# Altium PCB Toygether_PCB.PcbDoc (part 2 of 2)
Units mm, origin at the board's own origin, x right, y up, seen from the top; angles counter-clockwise.
Board outline 55 x 58.13 mm, 5 copper layers (Top Layer, Signal Layer 1, Signal Layer 2, Signal Layer 3, Bottom Layer), stack 0.941 mm thick; 93 components, 74 nets, 341 pads, 162 vias.
Unrouted connection lines stored in the file: 2.
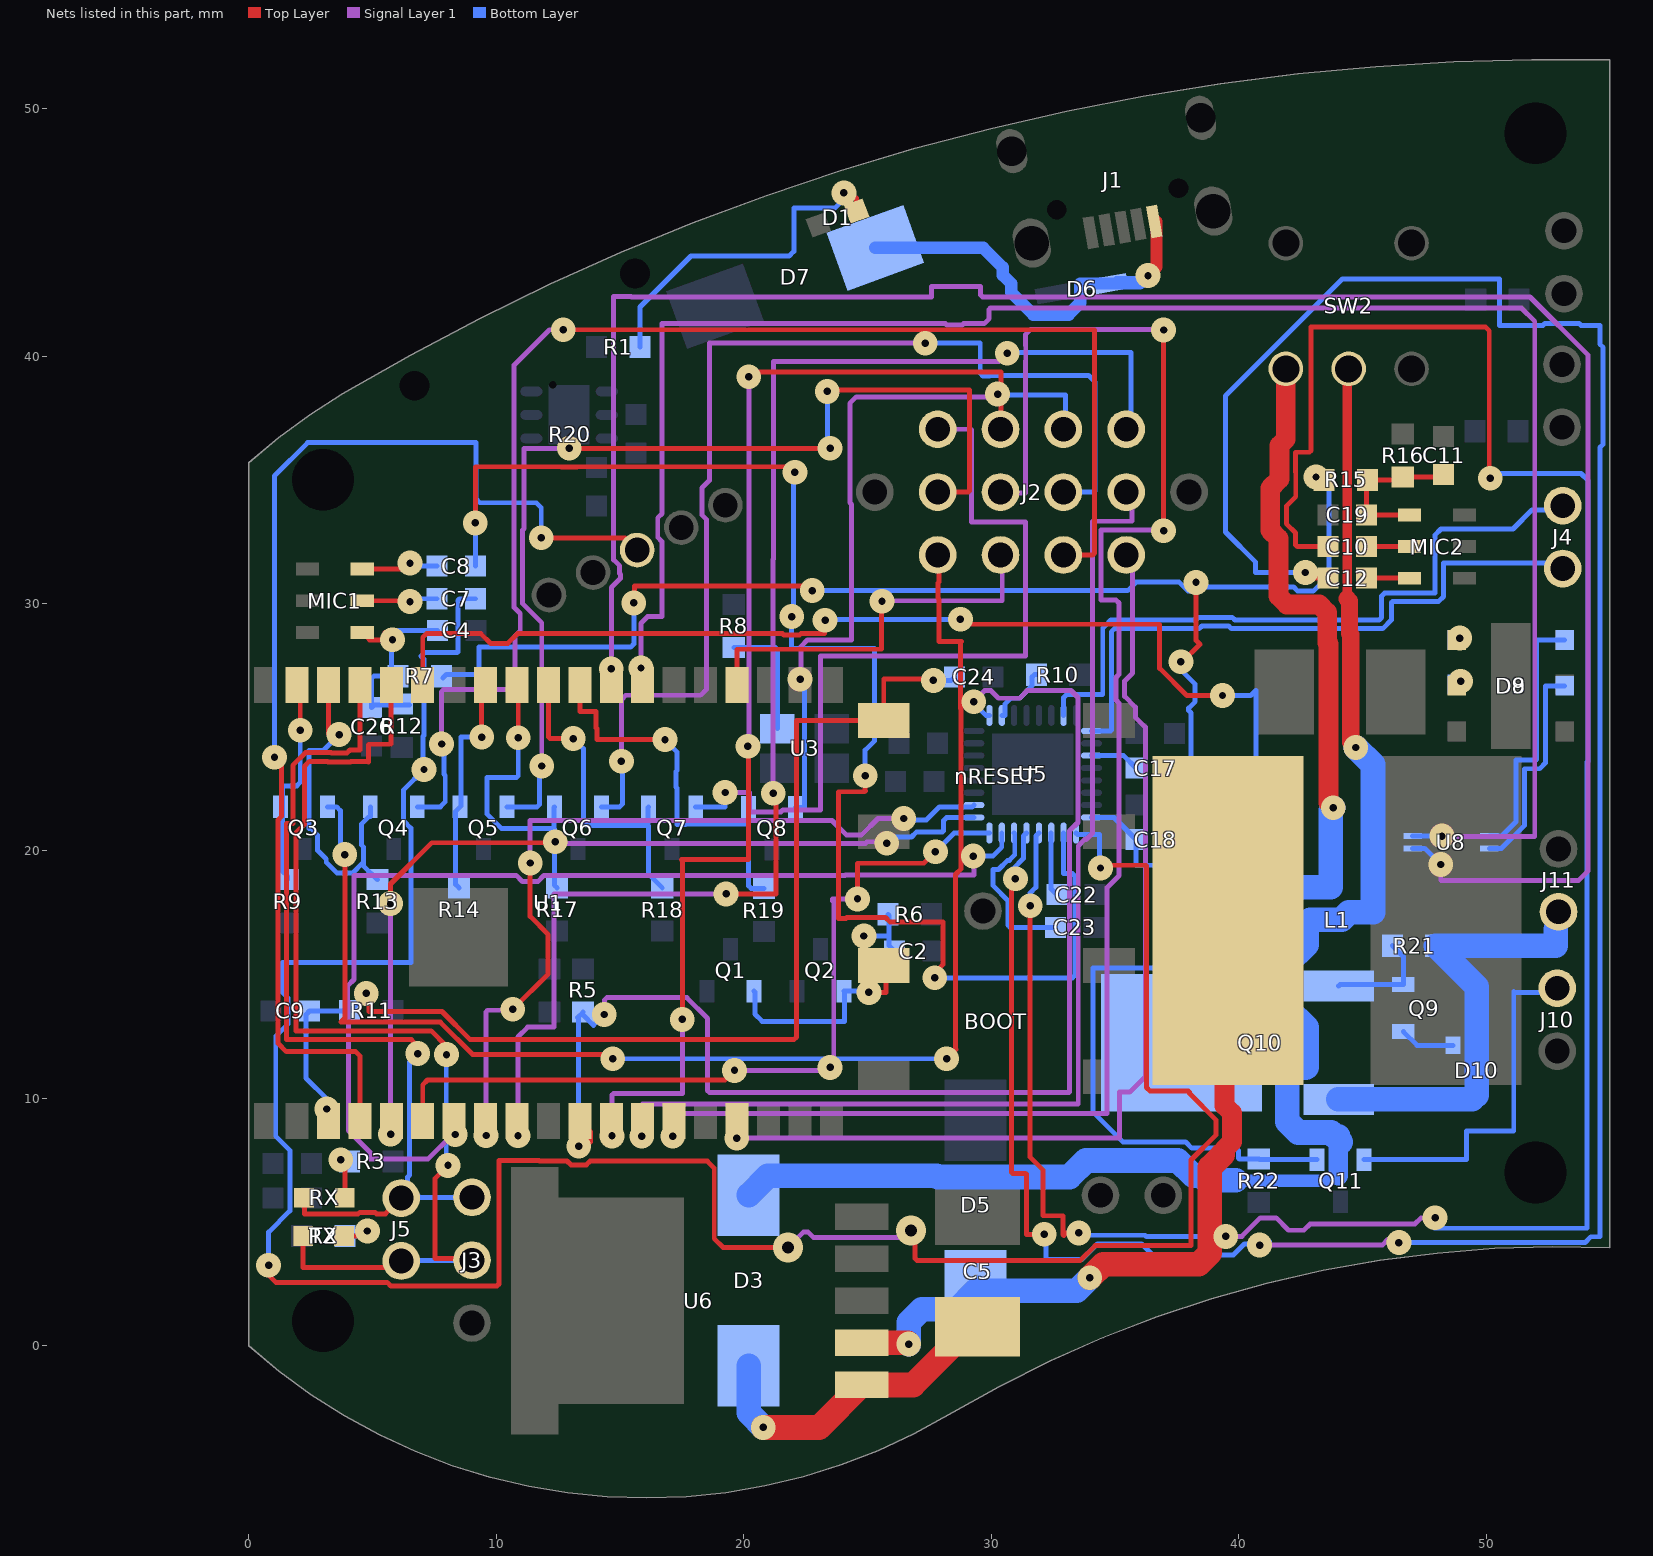
[diagram p5: the nets of this part, all layers, seen from the top]

## Via types
v1: diameter 1, hole 0.3, Top Layer to Bottom Layer, 78 vias
v2: diameter 1, hole 0.3, Top Layer to Signal Layer 1, 31 vias
v3: diameter 1, hole 0.3, Signal Layer 1 to Bottom Layer, 27 vias
v4: diameter 1.27, hole 0.711, Top Layer to Bottom Layer, 8 vias
v5: diameter 1.2, hole 0.5, Signal Layer 1 to Bottom Layer, 7 vias
v6: diameter 1.2, hole 0.5, Top Layer to Bottom Layer, 6 vias
v7: diameter 1.2, hole 0.5, Top Layer to Signal Layer 1, 5 vias

## Nets (pads, with @x,y where several pads share a name; then routed paths per layer and width w, separated by ;. In a path a pad name is that pad's centre, name@x,y a point inside that pad or via, vN(x,y) a via of type N, cw(c..) or ccw(c..) an arc to the next point about the centre after c; other vN are vias at no path point) (continued)
I2C_SDA: R5.2 U1.11 U5.17 | length 54
  Top Layer w0.2: v1(13.33,8.06) v1@13.38,8.11 ; v1@13.38,8.11 13.511,8.241 13.811,8.241 13.811,8.649 U1.11@13.38,9.08 v1@13.38,8.11
  Signal Layer 1 w0.2: v3(14.37,13.39) 14.37,13.97 14.47,14.07 17.701,14.07 18.541,13.23 18.541,10.311 18.611,10.24 33.15,10.24 33.17,10.26 33.17,20.81 33.51,21.15 33.51,26.2 33.23,26.48 31.462,26.48 31.152,26.17 30.298,26.17 29.988,26.48 29.74,26.48 29.3,26.04 v3(29.3,26.03)
  Bottom Layer w0.2: v1@13.505,8.235 13.48,8.26 13.33,8.11 13.33,13.225 13.29,13.265 R5.2@13.51,13.485 ; R5.2@13.51,13.366 13.928,12.948 v3(14.37,13.39) ; v3(29.3,26.03) 29.3,25.96 29.785,25.475 U5.17@29.93,25.475
I2S_BCK: U1.6 U5.8 | length 33.5
  Top Layer w0.2: U1.6@7.03,9.08 7.03,10.55 7.22,10.74 19.24,10.74 v2(19.63,11.13) ; v2@23.38,11.25 v2(23.49,11.25) ; v2(24.6,18.06) 24.6,19.5 27.28,19.5 v1(27.75,19.97)
  Signal Layer 1 w0.2: v2(19.63,11.13) 23.37,11.13 v2(23.49,11.25) 23.64,11.4 23.64,17.921 23.58,17.981 23.58,18.06 v2(24.6,18.06)
  Bottom Layer w0.2: v1(27.75,19.97) 28.505,20.725 U5.8@29.93,20.725
I2S_IN: U1.5 U5.9 | length 35.2
  Top Layer w0.2: v2(5.73,17.87) 5.73,18.66 7.4,20.33 12.35,20.33 v2(12.39,20.37)
  Signal Layer 1 w0.2: v2(5.73,8.55) v2(5.73,17.87) ; v2(12.39,20.37) 12.46,20.3 24.916,20.3 24.986,20.37 25.72,20.37 v3(25.78,20.31)
  Bottom Layer w0.2: v3(25.78,20.31) 26.03,20.56 26.781,20.56 26.981,20.76 28.03,20.76 28.08,20.81 28.08,21.23 28.2,21.35 U5.9@29.305,21.35
I2S_OUT: U1.8 U5.10 | length 33.4
  Top Layer w0.2: v2(10.67,13.6) 12.09,15.02 12.09,16.632 11.37,17.352 v2(11.37,19.51)
  Signal Layer 1 w0.2: v2(9.59,8.5) 9.59,13.5 9.65,13.56 10.63,13.56 v2(10.67,13.6) ; v2(11.37,19.51) 11.37,21.23 23.569,21.23 24.149,20.65 24.771,20.65 25.431,21.31 v3(26.47,21.31)
  Bottom Layer w0.2: v3(26.47,21.31) 26.53,21.25 27.38,21.25 27.905,21.775 29.23,21.775 U5.10@29.305,21.85
I2S_WS: U1.7 U5.7 | length 43.7
  Signal Layer 1 w0.2: v2(8.34,8.54) 8.239,8.54 7.239,7.54 4.89,7.54 4.89,7.83 4.03,8.69 4.03,13.9 4,13.929 4,14.551 4.25,14.801 4.25,19.01 10.809,19.01 11.059,18.76 11.681,18.76 11.931,19.01 24.089,19.01 24.109,19.03 29.3,19.03 29.3,19.71 29.33,19.74 v3(29.28,19.79)
  Bottom Layer w0.2: v3(29.28,19.79) 30.07,19.79 30.43,20.15 U5.7@30.43,20.725
L1_N: C8.1 U5.2 | length 58.3
  Top Layer w0.2: v1(9.155,33.255) 9.155,35.525 12.634,35.525 12.639,35.52 13.261,35.52 13.266,35.525 21.845,35.525 v1(22.07,35.3) ; v1(24.91,23.034) 24.91,22.43 24.92,22.42 24.89,22.39 23.83,22.39 23.83,17.27 24.129,17.27 24.169,17.31 24.911,17.31 25.731,17.31 25.921,17.12 28.05,17.12 28.05,15.4 27.72,15.07 v1(27.72,14.87)
  Bottom Layer w0.2: C8.1@9.155,31.51 v1(9.155,33.255) ; v1(22.07,35.3) 22.02,35.25 22.02,29.55 v1(21.94,29.47) 21.94,28.18 25.29,28.18 25.29,24.45 24.91,24.07 v1(24.91,23.034) ; v1(27.72,14.87) 33.28,14.87 33.39,14.98 33.39,18.98 33.28,19.09 32.93,19.09 U5.2@32.93,20.725
L1_P: C7.1 U5.1 | length 106.6
  Top Layer w0.2: v1(0.8,3.26) 0.4,3.26 1.097,2.563 5.595,2.563 5.741,2.418 10.028,2.418 10.11,2.5 10.11,7.48 11.729,7.48 11.739,7.47 12.859,7.47 13.019,7.31 13.641,7.31 13.791,7.46 18.53,7.46 18.81,7.18 18.81,4.33 19.169,3.971 v7(21.79,3.971) ; v7(26.76,4.66) 26.76,4.49 26.92,4.33 26.92,3.781 26.93,3.771 26.93,3.53 27.01,3.45 33.601,3.45 34.201,4.05 38.08,4.05 38.08,7.511 39.083,8.514 39.083,9.136 38.02,10.199 38.02,10.25 37.98,10.29 36.426,10.29 36.28,10.436 36.28,19.39 36.25,19.42 v1@34.5,19.42 ; v1@34.24,19.16 34.405,19.325 34.41,19.33 v1@34.5,19.42 ; v1(34.42,19.31) 34.42,19.34 v1@34.5,19.42
  Signal Layer 1 w0.2: v7(21.79,3.971) 22.409,4.59 22.608,4.59 22.828,4.37 26.47,4.37 v7(26.76,4.66)
  Bottom Layer w0.2: v1(0.8,3.26) 0.8,4.591 1.66,5.451 1.66,6.841 1.66,7.899 1.514,8.045 1.09,8.469 1.09,12.511 1.58,13.001 1.58,14.059 1.37,14.269 1.37,15.49 6.55,15.49 6.55,20.922 6.26,21.212 6.26,22.47 v1(7.08,23.29) 7.04,23.33 7.04,24.631 7.08,24.671 7.08,27.75 6.96,27.87 7.1,28.01 8.42,28.01 8.45,28.04 8.45,30.13 8.51,30.19 C7.1@9.155,30.19 ; U5.1@33.43,20.725 33.495,20.66 34.38,20.66 34.38,19.6 34.5,19.48 34.42,19.4 v1(34.42,19.31)
L2_P: C22.2 U5.3 | length 2.6
  Bottom Layer w0.2: U5.3@32.43,20.725 32.42,20.715 32.42,18.465 C22.2@32.655,18.23
LED1: Q3.1 R9.2 U1.37 | length 8.6
  Top Layer w0.2: U1.37@1.95,26.7 2.08,26.57 v1(2.08,24.88)
  Bottom Layer w0.2: R9.2@1.57,18.835 1.57,18.97 1.36,19.18 1.36,22.63 1.94,22.63 2.08,22.77 v1(2.08,24.88)
LED2: Q4.1 R13.2 U1.36 | length 14
  Top Layer w0.2: U1.36@3.22,26.7 3.22,24.73 3.25,24.7 v1(3.65,24.7)
  Bottom Layer w0.2: v1(3.65,24.7) 3,24.05 2.43,24.05 2.43,20.91 2.504,20.91 2.78,20.634 2.78,20.025 3.13,19.675 3.13,19.539 3.569,19.1 4.191,19.1 4.63,19.539 ; Q4.1@4.91,21.78 4.91,21.392 4.898,21.38 4.848,21.38 4.563,21.095 4.563,20.228 4.63,20.161 4.63,19.539 ; R13.2@5.2,18.835 4.63,19.405 4.63,19.539
LED3: Q5.1 R14.2 U1.31 | length 9.3
  Top Layer w0.2: v1(9.41,24.6) 9.41,26.54 U1.31@9.57,26.7
  Bottom Layer w0.2: R14.2@8.5,18.505 8.36,18.645 8.36,21.6 Q5.1@8.54,21.78 8.58,21.82 8.58,24.61 8.59,24.6 v1(9.41,24.6)
LED4: Q6.1 R17.2 U1.30 | length 12.7
  Top Layer w0.2: U1.30@10.84,26.7 10.89,26.65 v1(10.89,24.57)
  Bottom Layer w0.2: v1(10.89,24.57) 10.89,23.03 10.83,22.97 9.63,22.97 9.63,21.486 10.206,20.91 12.33,20.91 ; Q6.1@12.35,21.78 12.33,21.76 12.33,20.91 ; R17.2@12.46,18.505 12.35,18.615 12.35,20.89 12.33,20.91
LED5: Q7.1 R18.2 U1.29 | length 12.9
  Top Layer w0.2: U1.29@12.11,26.7 12.11,24.61 12.18,24.54 v1(13.11,24.54)
  Bottom Layer w0.2: v1(13.11,24.54) 13.52,24.13 13.52,21.12 13.62,21.02 16.14,21.02 ; Q7.1@16.16,21.78 16.14,21.76 16.14,21.02 ; R18.2@16.71,18.505 16.16,19.055 16.16,21 16.14,21.02
LED6: Q8.1 R19.2 U1.28 | length 16
  Top Layer w0.2: U1.28@13.38,26.7 13.38,25.63 14.04,25.63 14.04,24.97 14.07,24.94 14.07,24.51 14.08,24.5 v1(16.82,24.5)
  Bottom Layer w0.2: v1(16.82,24.5) 16.82,24.48 17.3,24 17.3,23.241 17.26,23.201 17.26,22.579 17.3,22.539 17.3,21.07 17.646,21.07 17.656,21.08 20.14,21.08 ; Q8.1@20.2,21.76 20.2,21.14 20.14,21.08 ; R19.2@20.82,18.485 20.3,18.485 20.2,18.585 20.2,21.02 20.14,21.08
MIC_BIAS: C18.1 R7.2 R15.2 U5.32 | length 62.9
  Top Layer w0.2: v1(15.56,30.02) 15.59,30.05 15.59,30.7 22.59,30.7 v1(22.77,30.52) ; v1(37.67,27.64) 37.73,27.64 38.44,28.35 38.28,28.51 v1(38.28,30.85)
  Bottom Layer w0.2: R7.2@7.85,26.995 7.99,27.135 9.295,27.135 9.295,28.235 15.435,28.235 15.56,28.36 v1(15.56,30.02) ; v1(22.77,30.52) 35.52,30.52 35.86,30.86 37.6,30.86 37.95,30.51 38.23,30.51 v1@38.28,30.56 ; U5.32@34.055,21.35 34.965,21.35 C18.1@35.855,20.46 35.855,19.42 38.06,19.42 38.08,19.44 38.08,25.58 37.985,25.675 37.98,25.67 37.98,25.768 38.245,26.033 38.245,26.737 37.68,27.302 37.68,27.63 v1(37.67,27.64) ; v1(38.28,30.85) v1@38.28,30.84 ; v1(43.13,35.11) 43.65,35.11 43.65,31.138 43.011,30.499 42.39,30.499 42.219,30.67 v1@38.39,30.67 ; v1@38.28,30.56 v1@38.28,30.67 ; v1@38.28,30.56 v1@38.39,30.67 ; v1@38.28,30.67 v1@38.39,30.67 ; v1@38.28,30.67 v1@38.28,30.84 ; v1@38.28,30.84 38.42,30.7 v1@38.39,30.67
NetC2_2: BOOT.4 C2.2 Q1.1 Q2.1 R6.2 | length 13.9
  Top Layer w0.2: v1(25.06,14.28) 25.75,14.28 25.75,15.28 BOOT.4@25.66,15.37
  Bottom Layer w0.2: Q1.1@20.42,14.33 20.449,14.301 20.449,13.41 20.749,13.11 24.08,13.11 24.08,14.3 Q2.1@24.05,14.33 25.01,14.33 v1(25.06,14.28) 25.06,14.77 25.259,14.969 24.86,15.368 v1(24.86,16.56) 25.88,16.56 ; R6.2@25.834,17.44 25.88,17.394 25.88,16.56 ; C2.2@26.103,15.951 25.88,16.173 25.88,16.56
NetC4_2: C4.2 C26.2 MIC1.1 R7.1 R12.2 | length 9
  Top Layer w0.2: MIC1.1@4.585,28.83 4.883,28.532 v1(5.808,28.532) v1@5.51,28.83
  Bottom Layer w0.2: v1(5.808,28.532) v1@5.808,28.562 ; R12.2@6.5,25.895 5.065,25.895 C26.2@4.965,25.795 4.965,26.975 5.05,27.06 5.775,27.06 5.775,28.595 v1@5.808,28.562 ; C4.2@7.635,28.91 6.06,28.91 5.808,28.658 v1@5.808,28.562
NetC5_2: C5.2 D3.2 U6.1 | length 13.1
  Top Layer w1: v1(20.79,-3.3) 23.048,-3.3 U6.1@24.768,-1.58 26.85,-1.58 29.2,0.77 C5.2@29.45,0.77
  Bottom Layer w1: D3.2@20.2,-0.81 20.2,-2.71 v1(20.79,-3.3)
NetC7_2: C7.2 MIC1.2 | length 3.1
  Top Layer w0.2: MIC1.2@4.585,30.11 6.48,30.11 v1(6.515,30.075)
  Bottom Layer w0.2: v1(6.515,30.075) 6.63,30.19 C7.2@7.605,30.19
NetC8_2: C8.2 MIC1.3 | length 3.2
  Top Layer w0.2: MIC1.3@4.585,31.39 6.275,31.39 v1(6.515,31.63)
  Bottom Layer w0.2: v1(6.515,31.63) 6.635,31.51 C8.2@7.605,31.51
NetC10_2: C10.2 MIC2.2 | length 1.8
  Top Layer w0.2: C10.2@45.165,32.3 MIC2.2@46.915,32.3
NetC11_2: C11.2 C19.2 MIC2.1 R15.1 R16.2 | length 6.4
  Top Layer w0.2: MIC2.1@46.915,33.58 C19.2@45.165,33.58 45.165,34.95 R15.1@45.205,34.99 46.525,34.99 R16.2@46.64,35.105 48.19,35.105 C11.2@48.29,35.205
NetC12_2: C12.2 MIC2.3 | length 1.8
  Top Layer w0.2: C12.2@45.165,31.02 MIC2.3@46.915,31.02
NetC17_1: C17.1 U5.27 | length 2
  Bottom Layer w0.2: U5.27@34.055,23.85 35.355,23.85 C17.1@35.855,23.35
NetD1_1: D1.1 R1.1 | length 14.1
  Top Layer w0.2: v1(24.05,46.59) 24.245,46.395 24.565,46.395 D1.1@24.565,45.862
  Bottom Layer w0.2: R1.1@15.805,40.36 15.81,40.365 15.81,41.98 17.87,44.04 21.84,44.04 22.03,44.23 22.03,45.99 23.7,45.99 24.1,46.39 24.05,46.44 v1(24.05,46.59)
NetD2_1: R3.1 RX.1 | length 2.1
  Top Layer w0.2: v1(3.72,7.52) 3.72,7.64 3.785,7.705 3.97,7.52 3.88,7.43 RX.1@3.88,5.98
NetD3_1: D3.1 SW2.2 | length 67.2
  Top Layer w0.4: 44.39,30.19 44.39,39.423 SW2.2@44.45,39.483
  Top Layer w0.7: 44.39,30.19 44.48,30.1 44.48,28.786 44.53,28.736 44.53,24.39 v1(44.74,24.18)
  Bottom Layer w0.2: 33.813,7.47 37.567,7.47 ; 44.03,8.239 44.03,8.329 44.03,8.46
  Bottom Layer w0.5: 39.878,6.87 40.054,6.87 40.254,6.67 43.654,6.67 43.854,6.87 44.03,6.87
  Bottom Layer w0.8: 44.03,6.87 44.03,8.239
  Bottom Layer w1: D3.1@20.2,6.09 20.98,6.87 27.801,6.87 27.851,6.82 33.163,6.82 33.813,7.47 33.835,7.492 35.005,7.492 36.375,7.492 37.545,7.492 37.567,7.47 38.167,6.87 38.51,6.87 38.687,6.693 39.878,6.693 ; 44.03,8.329 44.12,8.239 ; 44.03,8.46 43.899,8.46 43.739,8.62 42.411,8.62 41.965,9.066 41.965,10.854 42.346,11.235 42.715,11.235 42.75,11.27 42.75,12.861 41.965,13.646 41.965,15.434 42.75,16.219 42.75,17.06 42.91,17.22 44.16,17.22 44.46,17.52 45.43,17.52 45.43,23.49 v1(44.74,24.18)
NetD4_1: R2.1 TX.1 | length 2
  Top Layer w0.2: TX.1@3.85,4.44 4.595,4.44 v1(4.795,4.64)
  Bottom Layer w0.2: R2.1@3.885,4.44 4.595,4.44 v1(4.795,4.64)
NetD5_2: D5.2 L1.1 U6.2 | length 30.1
  Top Layer w0.2: v1@26.625,0.12 v1(26.675,0.07)
  Top Layer w0.8: 39.433,7.725 39.433,7.945 39.733,8.245 39.733,9.405 39.433,9.705 39.433,17.043 L1.1@39.58,17.19
  Top Layer w1: U6.2@24.768,0.12 v1@26.625,0.12 ; v1(33.99,2.75) 34.54,3.3 38.391,3.3 38.83,3.739 38.83,7.201 39.355,7.725
  Bottom Layer w1: v1(26.675,0.07) 26.675,0.95 27.2,1.475 28.625,1.475 D5.2@29.37,2.22 33.46,2.22 v1(33.99,2.75)
NetD8_1: D8.1 U8.2 | length 10.6
  Bottom Layer w0.2: U8.2@50.13,20.6 50.63,20.6 51.21,21.18 51.21,23.67 51.415,23.67 52.02,23.67 52.05,23.7 52.05,28.47 52.1,28.52 D8.1@53.175,28.52
NetD8_2: D8.2 U8.3 | length 8.9
  Bottom Layer w0.2: U8.3@50.13,20.1 50.625,20.1 51.56,21.035 51.56,23.32 52.165,23.32 52.4,23.555 52.4,26.67 D8.2@53.175,26.67
NetD8_5: D8.5 D9.2
  other v1: 48.97,26.86
NetD8_6: D8.6 D9.1
  other v1: 48.94,28.6
NetD10_1: D10.1 Q9.1 | length 2.2
  Bottom Layer w0.2: Q9.1@46.66,12.695 47.215,12.14 D10.1@48.67,12.14
NetQ9_2: Q9.2 Q10.1 R21.1 | length 4.4
  Bottom Layer w0.2: Q10.1@44.04,14.54 44.095,14.595 Q9.2@46.66,14.595 46.66,15.725 R21.1@46.215,16.17
NetR8_2: R8.2 U3.1 | length 5
  Bottom Layer w0.2: R8.2@19.6,28.215 21.29,28.215 21.36,28.145 U3.1@21.36,24.94
NetR10_2: R10.2 U5.18 | length 2.6
  Bottom Layer w0.2: U5.18@30.43,25.475 30.555,25.475 30.555,25.93 30.795,26.17 31.152,26.17 31.65,26.668 31.65,27.025 31.745,27.12 R10.2@31.825,27.12
nOUT_LED1: J2.1 Q3.2 | length 56
  Top Layer w0.2: v1(3.88,19.85) 3.88,13.25 3.72,13.09 3.73,13.08 7.741,13.08 9.041,11.78 14.53,11.78 v1(14.71,11.6) ; J2.1@27.84,31.96 27.9,31.9 27.9,30.871 27.86,30.831 27.86,30.209 27.9,30.169 27.9,28.47 28.8,28.47 28.77,28.44 28.77,25.761 28.79,25.741 28.79,19.274 28.56,19.044 28.56,12.02 ; v1(28.2,11.6) 28.58,11.98
  Bottom Layer w0.2: Q3.2@3.18,21.78 3.548,21.78 3.7,21.628 3.7,19.87 3.72,19.85 v1(3.88,19.85) ; v1(14.71,11.6) v1(28.2,11.6)
nOUT_LED2: J2.3 Q4.2 | length 56.4
  Top Layer w0.2: v2(12.705,41.06) 34.18,41.06 34.18,32.04 34.1,31.96 J2.3@32.92,31.96
  Signal Layer 1 w0.2: v3(7.79,24.32) 7.79,26.43 7.89,26.53 10.76,26.53 10.76,28.678 10.97,28.888 10.97,29.592 10.72,29.842 10.72,39.63 12.15,41.06 v2(12.705,41.06)
  Bottom Layer w0.2: Q4.2@6.81,21.78 7.74,21.78 7.94,21.98 7.94,23.05 7.89,23.1 7.89,24.3 7.87,24.32 v3(7.79,24.32)
nOUT_LED3: J2.5 Q5.2 | length 41.7
  Top Layer w0.2: v2(12.95,36.27) v1(23.49,36.27) ; v1@23.592,38.62 29.13,38.62 29.13,34.55 29.08,34.5 J2.5@27.84,34.5
  Signal Layer 1 w0.2: v3(11.84,23.43) 11.84,29.217 11.07,29.987 11.07,32.961 11.13,33.021 11.13,36.27 v2(12.95,36.27)
  Bottom Layer w0.2: Q5.2@10.44,21.78 11.65,21.78 11.74,21.87 11.74,23.33 v3(11.84,23.43) ; v1(23.38,38.57) 23.38,36.38 v1(23.49,36.27)
nOUT_LED4: J2.7 Q6.2 | length 45.6
  Signal Layer 1 w0.2: v3(15.06,23.62) 15.06,26.12 15.23,26.29 18.26,26.29 18.49,26.52 18.49,33.398 18.309,33.58 18.309,34.668 18.61,34.969 18.61,40.52 v3(27.34,40.52)
  Bottom Layer w0.2: Q6.2@14.25,21.78 14.99,21.78 15.11,21.9 15.11,23.57 v3(15.06,23.62) ; v3(27.34,40.52) 29.56,40.52 29.56,39.3 29.67,39.19 29.929,39.19 29.949,39.21 33.94,39.21 34.19,38.96 34.19,34.55 34.14,34.5 J2.7@32.92,34.5
nOUT_LED5: J2.9 Q7.2 | length 33.6
  Signal Layer 1 w0.2: v3(19.25,22.36) 20.23,22.36 20.24,22.35 20.24,21.58 21.511,21.58 21.591,21.66 23.11,21.66 23.11,27.88 31.39,27.88 31.39,31.539 31.392,31.541 31.392,32.379 31.39,32.381 31.39,33.29 29.21,33.29 29.21,37.02 29.19,37.04 J2.9@27.84,37.04
  Bottom Layer w0.2: Q7.2@18.06,21.78 19.25,21.78 v3(19.25,22.36)
nOUT_LED6: J2.11 Q8.2 | length 29
  Signal Layer 1 w0.2: v3(22.28,26.94) 22.32,26.98 22.32,28.27 22.58,28.53 24.36,28.53 24.36,34.009 24.288,34.081 24.288,38.088 24.55,38.35 30.23,38.35 30.26,38.38 v3(30.26,38.46)
  Bottom Layer w0.2: Q8.2@22.1,21.76 22.45,21.76 22.45,26.77 v3(22.28,26.94) ; v3(30.26,38.46) 30.29,38.43 33,38.43 33,37.12 J2.11@32.92,37.04
nOUT_VIBRATOR: J10.2 Q11.2 | length 15.1
  Bottom Layer w0.2: Q11.2@45.07,7.52 49.21,7.52 49.21,8.68 51.12,8.68 51.12,14.31 51.15,14.28 J10.2@53.32,14.28
nRESET: C9.2 C24.2 nRESET.4 R11.1 U1.3 | length 46.9
  Top Layer w0.2: v1(4.75,14.24) 4.78,14.27 4.85,14.2 4.85,13.51 7.806,13.51 8.946,12.37 22.03,12.37 22.14,12.48 22.14,25.27 nRESET.4@25.66,25.27 25.66,26.94 v1@28.02,26.94
  Bottom Layer w0.2: v1(3.15,9.57) 3.15,9.979 2.31,10.819 2.31,13.385 2.455,13.53 R11.1@4.075,13.53 4.75,14.205 v1(4.75,14.24) ; v1(27.668,26.89) 28.385,26.89 C24.2@28.525,27.03
PRES_LED_CLK: U1.27 U8.6 | length 86.1
  Top Layer w0.2: U1.27@14.65,26.7 v2(14.65,27.36)
  Signal Layer 1 w0.2: v2(14.65,27.36) 14.65,30.643 14.863,30.856 15.02,31.013 15.02,31.18 14.99,31.21 14.99,31.519 14.745,31.764 14.745,42.405 15.446,42.405 15.464,42.387 27.587,42.387 27.587,42.807 29.577,42.807 29.577,42.47 29.66,42.387 51.775,42.387 54.112,40.049 54.112,19.182 53.74,18.81 48.17,18.81 v3(48.17,19.45)
  Bottom Layer w0.2: U8.6@47.03,20.1 47.52,20.1 v3(48.17,19.45)
PRES_LED_SD: U1.26 U8.7 | length 76.6
  Signal Layer 1 w0.2: v2(15.85,27.39) 15.85,29.2 16.115,29.465 16.7,29.465 16.7,32.496 16.527,32.669 16.527,33.459 16.7,33.632 16.7,41.31 28.149,41.31 28.209,41.25 28.831,41.25 28.891,41.31 29.72,41.31 29.92,41.51 29.92,41.89 29.97,41.94 51.43,41.94 51.97,41.4 51.97,20.58 48.24,20.58 v3(48.22,20.6)
  Bottom Layer w0.2: U8.7@47.03,20.6 v3(48.22,20.6)
R1_N: C12.1 U5.5 | length 109.3
  Top Layer w0.2: v1(30.98,18.87) 30.83,18.72 30.83,7.01 30.87,6.97 31.39,6.97 31.425,6.935 31.425,4.505 v1(32.145,4.505) ; v1(42.701,31.249) 42.93,31.02 C12.1@43.615,31.02
  Signal Layer 1 w0.2: v3(40.85,4.07) 45.808,4.07 46.038,4.3 46.221,4.118 46.273,4.17 v3(46.48,4.17)
  Bottom Layer w0.2: v1@30.87,19.26 31.305,19.695 31.305,20.6 U5.5@31.43,20.725 ; v1(32.145,4.505) 32.22,4.43 32.22,3.49 33.669,3.49 34.293,4.113 36.081,4.113 36.525,3.67 39.791,3.67 40.234,4.113 v3@40.893,4.113 ; v3(40.85,4.07) v3@40.893,4.113 ; v1(42.701,31.249) 40.69,31.249 40.69,31.67 39.47,32.89 39.47,38.387 44.193,43.11 50.54,43.11 50.54,41.24 52.3,41.24 52.382,41.322 53.758,41.322 53.84,41.24 54.6,41.24 54.6,40.48 54.732,40.348 54.732,36.432 54.6,36.3 54.6,4.406 54.238,4.406 54.002,4.17 v3(46.48,4.17) ; v3@40.893,4.113 40.99,4.21 41.252,4.21 41.155,4.113 v3@40.893,4.113
R1_P: C10.1 U5.4 | length 98.6
  Top Layer w0.2: v1(31.58,17.78) 31.58,7.62 32.09,7.11 32.09,5.255 32.9,5.255 32.9,4.49 32.94,4.45 33.05,4.56 v1(33.54,4.56) ; C10.1@43.615,32.3 42.371,32.3 42.301,32.37 42.301,32.857 41.93,33.228 41.93,33.932 42.31,34.312 42.31,35.305 42.301,35.315 42.301,36.11 42.86,36.11 42.93,36.18 42.93,41.18 49.97,41.18 50.13,41.02 50.13,35.1 v1(50.17,35.06)
  Signal Layer 1 w0.2: v3(39.48,4.42) 40.13,4.42 40.88,5.17 41.519,5.17 42.019,4.67 42.641,4.67 42.891,4.92 47.126,4.92 47.376,5.17 v3(47.942,5.17)
  Bottom Layer w0.2: v1(31.58,17.78) 31.58,18.3 31.805,18.525 31.805,20.6 U5.4@31.93,20.725 ; v1(33.54,4.56) 33.54,4.486 33.558,4.468 36.222,4.468 36.272,4.418 39.478,4.418 v3(39.48,4.42) ; v3(47.942,5.17) 47.942,4.772 47.92,4.75 54.087,4.75 54.087,23.587 54.112,23.612 54.112,34.978 53.84,35.25 50.36,35.25 v1(50.17,35.06)
R2_P: C23.2 U5.6 | length 6.5
  Bottom Layer w0.2: U5.6@30.93,20.725 30.955,20.7 30.955,19.84 30.735,19.62 30.669,19.62 30.299,19.25 30.08,19.25 30.08,18.591 30.682,17.989 30.682,16.998 30.769,16.911 C23.2@32.605,16.911
RXD: J3.1 J5.2 RX.2 U1.35 | length 35.6
  Top Layer w0.2: RX.2@2.23,5.98 2.25,5.96 2.25,5.33 4.424,5.33 4.484,5.39 5.106,5.39 5.166,5.33 5.52,5.33 J5.2@6.16,5.97 ; U1.35@4.49,26.7 4.49,24.08 4.091,24.08 3.961,23.95 3.339,23.95 3.319,23.97 2.291,23.97 1.78,23.459 1.78,21.1 1.53,21.1 1.53,12.37 6.57,12.37 6.83,12.11 v1(6.83,11.81)
  Bottom Layer w0.2: v1(6.83,11.81) 6.5,11.48 6.5,6.896 6.42,6.816 6.42,6.5 6.93,5.99 8.78,5.99 J3.1@8.81,6.02
SOUND_LEVEL: R20.2 U1.4 | length 48.3
  Top Layer w0.2: v1(1.04,23.78) 1.33,23.49 1.33,21.395 1.18,21.245 1.18,12.225 1.515,11.89 4.32,11.89 4.49,11.72 U1.4@4.49,9.08 ; v1(11.82,32.65) 15.202,32.65 R20.2@15.695,32.157
  Bottom Layer w0.2: v1(1.04,23.78) 1.04,35.161 2.379,36.5 9.19,36.5 9.19,34.22 9.34,34.07 11.62,34.07 11.82,33.87 v1(11.82,32.65)
SPK+: J4.1 U5.25 | length 26.1
  Bottom Layer w0.2: U5.25@34.055,24.85 34.83,24.85 34.86,24.88 34.86,28.855 34.985,28.98 38.411,28.98 38.521,29.09 39.598,29.09 39.708,28.98 45.825,28.98 46.18,29.335 46.18,30.04 46.21,30.07 48.075,30.07 48.28,30.275 48.28,31.63 53.15,31.63 J4.1@53.54,31.24
SPK-: J4.2 U5.23 | length 28
  Bottom Layer w0.2: U5.23@32.93,25.475 32.93,26.2 33.05,26.32 34.51,26.32 34.51,29 34.635,29.125 34.84,29.33 38.267,29.33 38.376,29.44 39.743,29.44 39.853,29.33 45.545,29.33 45.68,29.33 45.78,29.43 45.78,30.3 45.9,30.42 47.93,30.42 47.93,32.76 48.18,33.01 51.09,33.01 51.86,33.78 J4.2@53.54,33.78
TXD: J3.2 J5.1 TX.2 U1.34 | length 42.3
  Top Layer w0.2: TX.2@2.2,4.44 2.2,3.16 J5.1@6.16,3.16 ; U1.34@5.76,26.7 5.75,26.69 5.75,24.31 4.84,24.31 4.84,23.6 4.82,23.62 4.126,23.62 4.106,23.6 3.194,23.6 3.174,23.62 2.45,23.62 2.25,23.42 2.25,21.07 1.91,20.73 1.91,12.73 7.37,12.73 7.99,12.11 v1(7.99,11.77) ; v1(8.05,7.29) 7.53,6.77 7.53,3.52 8.96,3.52 J3.2@9.02,3.46
  Bottom Layer w0.2: J5.1@5.95,3.45 8.78,3.45 J3.2@8.81,3.48 ; v1(7.99,11.77) 7.98,11.76 7.98,7.36 v1(8.05,7.29)
VBAT: D10.3 J11.1 Q10.2 R21.2 | length 18.7
  Bottom Layer w0.2: D10.3@49.44,9.96 D10.3@49.62,10.14 ; J11.1@52.82,16.82 J11.1@53.37,17.37
  Bottom Layer w1: Q10.2@44.04,9.96 D10.3@49.44,9.96 ; D10.3@49.62,10.14 49.62,14.515 R21.2@47.965,16.17 52.82,16.17 J11.1@52.82,16.82
VBUS: D6.2 D7.1 J1.1 | length 17.1
  Top Layer w0.5: v1(36.34,43.25) 36.685,43.595 J1.1@36.685,45.436
  Bottom Layer w0.2: D6.2@35.053,43.14 v1@36.23,43.14
  Bottom Layer w0.5: D7.1@25.322,44.37 29.68,44.37 30.47,43.58 30.47,43.27 30.811,42.928 30.811,42.567 31.704,41.674 33.131,41.674 33.599,42.143 33.599,42.928 D6.2@34.842,42.928 36.018,42.928 v1(36.34,43.25)
VIBRATOR: Q11.1 R22.2 U1.33 | length 72.4
  Top Layer w0.2: U1.33@7.03,26.7 7.03,28.63 7.18,28.78 9.378,28.78 9.768,28.39 10.472,28.39 10.862,28.78 21.569,28.78 21.629,28.72 22.251,28.72 22.311,28.78 23.27,28.78 23.27,29.3 v1(23.29,29.32) ; v1(28.76,29.36) 28.76,29.16 36.81,29.16 36.81,27.379 37.909,26.28 v1(39.35,26.28)
  Bottom Layer w0.2: v1(23.29,29.32) 23.29,29.36 v1(28.76,29.36) ; v1(39.35,26.28) 40.49,26.28 40.7,26.49 40.7,16.856 40.065,16.221 40.065,15.275 34.336,15.275 34.331,15.27 34.12,15.27 34.12,9.441 35.319,8.242 37.856,8.242 38.108,7.99 39.9,7.99 39.99,7.9 39.99,7.59 40.035,7.545 R22.2@40.82,7.545 40.845,7.52 Q11.1@43.17,7.52
VSYS: Q10.3 SW2.1 | length 36
  Top Layer w0.8: SW2.1@41.91,39.483 41.91,36.639 41.651,36.379 41.651,35.026 41.28,34.655 41.28,32.959 41.61,32.629 41.61,30.3 41.951,29.96 43.26,29.96 43.58,29.64 43.58,28.413 43.63,28.363 43.63,21.94 v1(43.83,21.74)
  Bottom Layer w1: Q10.3@37.69,12.25 41.6,12.25 41.6,12.384 40.815,13.169 40.815,15.911 41.6,16.696 41.6,18.53 43.72,18.53 43.72,21.63 v1(43.83,21.74)
Z1: J2.2 U1.23 | length 16
  Top Layer w0.2: U1.23@19.73,26.7 19.73,28.15 25.57,28.15 25.57,30.11 v2(25.59,30.09)
  Signal Layer 1 w0.2: v2(25.59,30.09) 25.61,30.11 30.45,30.11 30.45,31.89 J2.2@30.38,31.96
Z2: J2.4 U1.16 | length 40.3
  Signal Layer 1 w0.2: v2(19.72,8.39) 35.18,8.39 35.18,10.25 35.6,10.25 36.23,10.88 36.23,24.999 35.83,25.399 35.83,25.809 35.395,26.244 35.395,26.865 35.72,27.19 35.72,31.7 J2.4@35.46,31.96
Z3: J2.6 U1.14 | length 66.8
  Top Layer w0.2: v2(36.97,32.94) v2(36.97,41.05)
  Signal Layer 1 w0.2: v2(17.13,8.47) 17.25,8.59 17.25,9.38 34.69,9.38 34.69,18.519 35.17,18.999 35.17,25.974 35.045,26.099 35.045,27.01 35.17,27.135 35.17,30.02 35.042,30.148 34.448,30.148 34.448,32.972 36.938,32.972 v2(36.97,32.94) ; J2.6@30.38,34.5 30.41,34.47 31.392,34.47 31.392,39.791 31.4,39.799 31.4,40.421 31.392,40.429 31.392,40.872 31.6,41.08 37,41.08 v2(36.97,41.05)
Z4: J2.8 U1.13 | length 45.7
  Signal Layer 1 w0.2: v2(15.88,8.47) 15.88,9.73 15.92,9.77 33.52,9.77 33.52,20.2 33.81,20.49 33.84,20.46 34.098,20.718 34.098,33.322 35.702,33.322 35.702,34.258 J2.8@35.46,34.5
Z5: J2.10 U1.12 | length 48.9
  Top Layer w0.2: v2(17.52,13.19) 17.52,19.62 17.49,19.65 20.19,19.65 20.19,24.21 v2(20.17,24.23) ; v2(20.2,39.16) 20.2,39.098 20.452,39.35 30.4,39.35 30.4,37.06 J2.10@30.38,37.04
  Signal Layer 1 w0.2: v2(14.68,8.48) 14.68,10.14 14.73,10.19 17.52,10.19 v2(17.52,13.19) ; v2(20.17,24.23) 20.209,24.269 20.209,39.151 v2(20.2,39.16)
Z6: J2.12 U1.9 | length 59.3
  Top Layer w0.2: v2(19.29,18.26) 21.3,18.26 21.3,22.23 v2(21.2,22.33)
  Signal Layer 1 w0.2: v2(10.88,8.49) 10.88,12.49 11.27,12.88 12.34,12.88 12.34,18.26 v2(19.29,18.26) ; v2(21.2,22.33) 21.19,22.34 21.19,31.781 21.2,31.791 21.2,39.77 30.31,39.77 v3(30.65,40.11)
  Bottom Layer w0.2: v3(30.65,40.11) 30.69,40.15 35.65,40.15 35.65,37.23 J2.12@35.46,37.04
pads on no net: BOOT.2 BOOT.3 D9.5 D9.6 D10.2 J1. J1.2 J1.3 J1.5 nRESET.2 nRESET.3 R20.4 R20.5 SW2.4 SW2.5 U1.17 U1.18 U1.19 U1.20 U1.21 U1.22 U1.32 U2.1 U2.4 U2.5 U5.15 U5.19 U5.20 U5.21 U5.22 U5.29 U5.30

## Polygon pours and split planes (outlines as drawn)
GND on Top Layer "Top Layer-GND" (solid, remove dead copper, pour order 8): 55,51.97 51.844,51.982 48.69,51.891 45.541,51.697 42.399,51.4 39.269,51.001 36.154,50.499 33.056,49.896 29.98,49.192 26.929,48.387 23.906,47.484 20.914,46.482 17.956,45.382 15.036,44.187 12.156,42.896 9.32,41.512 6.531,40.037 3.791,38.47 2.468,37.625 1.202,36.694 0,35.683 0,0 1.225,-1.03 2.517,-1.976 3.868,-2.833 5.274,-3.599 6.728,-4.269 8.223,-4.84 9.753,-5.311 11.311,-5.679 12.89,-5.941 14.483,-6.098 16.083,-6.149 17.682,-6.092 19.275,-5.93 20.853,-5.661 22.409,-5.287 23.937,-4.811 25.43,-4.234 26.882,-3.558 28.285,-2.788 30.315,-1.647 32.397,-0.606 34.527,0.334 36.699,1.171 38.91,1.903 41.152,2.528 43.423,3.045 45.715,3.452 48.024,3.748 50.345,3.934 52.672,4.008 55,3.97
GND on Bottom Layer "Bottom Layer-No Net" (solid, remove dead copper, pour order 9): 55,51.97 51.844,51.982 48.69,51.891 45.541,51.697 42.399,51.4 39.269,51.001 36.154,50.499 33.056,49.896 29.98,49.192 26.929,48.387 23.906,47.484 20.914,46.482 17.956,45.382 15.036,44.187 12.156,42.896 9.32,41.512 6.531,40.037 3.791,38.47 2.468,37.625 1.202,36.694 0,35.683 0,0 1.225,-1.03 2.517,-1.976 3.868,-2.833 5.274,-3.599 6.728,-4.269 8.223,-4.84 9.753,-5.311 11.311,-5.679 12.89,-5.941 14.483,-6.098 16.083,-6.149 17.682,-6.092 19.275,-5.93 20.853,-5.661 22.409,-5.287 23.937,-4.811 25.43,-4.234 26.882,-3.558 28.285,-2.788 30.315,-1.647 32.397,-0.606 34.527,0.334 36.699,1.171 38.91,1.903 41.152,2.528 43.423,3.045 45.715,3.452 48.024,3.748 50.345,3.934 52.672,4.008 55,3.97
GND on Signal Layer 1 "Signal 1 Layer-GND" (solid, remove dead copper, pour order 10): 55,51.97 51.844,51.982 48.69,51.891 45.541,51.697 42.399,51.4 39.269,51.001 36.154,50.499 33.056,49.896 29.98,49.192 26.929,48.387 23.906,47.484 20.914,46.482 17.956,45.382 15.036,44.187 12.156,42.896 9.32,41.512 6.531,40.037 3.791,38.47 2.468,37.625 1.202,36.694 0,35.683 0,0 1.225,-1.03 2.517,-1.976 3.868,-2.833 5.274,-3.599 6.728,-4.269 8.223,-4.84 9.753,-5.311 11.311,-5.679 12.89,-5.941 14.483,-6.098 16.083,-6.149 17.682,-6.092 19.275,-5.93 20.853,-5.661 22.409,-5.287 23.937,-4.811 25.43,-4.234 26.882,-3.558 28.285,-2.788 30.315,-1.647 32.397,-0.606 34.527,0.334 36.699,1.171 38.91,1.903 41.152,2.528 43.423,3.045 45.715,3.452 48.024,3.748 50.345,3.934 52.672,4.008 55,3.97
5V on Signal Layer 2 "Signal Layer 2-5V" (solid, pour order 12): 55,51.97 51.844,51.982 48.69,51.891 45.541,51.697 42.399,51.4 39.269,51.001 36.154,50.499 33.056,49.896 29.98,49.192 26.929,48.387 23.906,47.484 20.914,46.482 17.956,45.382 15.036,44.187 12.156,42.896 9.32,41.512 6.531,40.037 3.791,38.47 2.468,37.625 1.202,36.694 0,35.683 0,0 1.225,-1.03 2.517,-1.976 3.868,-2.833 5.274,-3.599 6.728,-4.269 8.223,-4.84 9.753,-5.311 11.311,-5.679 12.89,-5.941 14.483,-6.098 16.083,-6.149 17.682,-6.092 19.275,-5.93 20.853,-5.661 22.409,-5.287 23.937,-4.811 25.43,-4.234 26.882,-3.558 28.285,-2.788 30.315,-1.647 32.397,-0.606 34.527,0.334 36.699,1.171 38.91,1.903 41.152,2.528 43.423,3.045 45.715,3.452 48.024,3.748 50.345,3.934 52.672,4.008 55,3.97
3V3 on Signal Layer 3 "Signal Layer 3-3V3" (solid, remove dead copper, pour order 13): 55,51.97 51.844,51.982 48.69,51.891 45.541,51.697 42.399,51.4 39.269,51.001 36.154,50.499 33.056,49.896 29.98,49.192 26.929,48.387 23.906,47.484 20.914,46.482 17.956,45.382 15.036,44.187 12.156,42.896 9.32,41.512 6.531,40.037 3.791,38.47 2.468,37.625 1.202,36.694 0,35.683 0,0 1.225,-1.03 2.517,-1.976 3.868,-2.833 5.274,-3.599 6.728,-4.269 8.223,-4.84 9.753,-5.311 11.311,-5.679 12.89,-5.941 14.483,-6.098 16.083,-6.149 17.682,-6.092 19.275,-5.93 20.853,-5.661 22.409,-5.287 23.937,-4.811 25.43,-4.234 26.882,-3.558 28.285,-2.788 30.315,-1.647 32.397,-0.606 34.527,0.334 36.699,1.171 38.91,1.903 41.152,2.528 43.423,3.045 45.715,3.452 48.024,3.748 50.345,3.934 52.672,4.008 55,3.97

## Other copper
Top Layer:
  text "EPFL" at 49.22,4.27 h1.52
  text "TOP" at 0,0.66 h1.52 r321.69
Bottom Layer:
  text "BOT" at 3.3,-1.98 h1.52 r323.16

## Silkscreen, mask and mechanical layers (free items; w line width, h text height)
Top Overlay:
  text "ON" at 20.1,43.89 h1.52 r22.13
  text "Toygether2019" at 20.71,39.72 h1.52
  text "SPK" at 50.47,31.75 h1.52
  text "BAT" at 50.91,21.38 h1.52
  text "VIBR" at 49.08,8.59 h1.52
  text "BAT" at 38.38,5.47 h1.52
  text "G" at 6.34,-0.23 h1.52

## Text inside footprints (layer, text, board x,y; h text height)
J1: Mechanical 1 "PCB EDGE" at 41.527,51.993 h0.3 r190